# EAGLE board sencerMain2 (EAGLE 7.4.0)
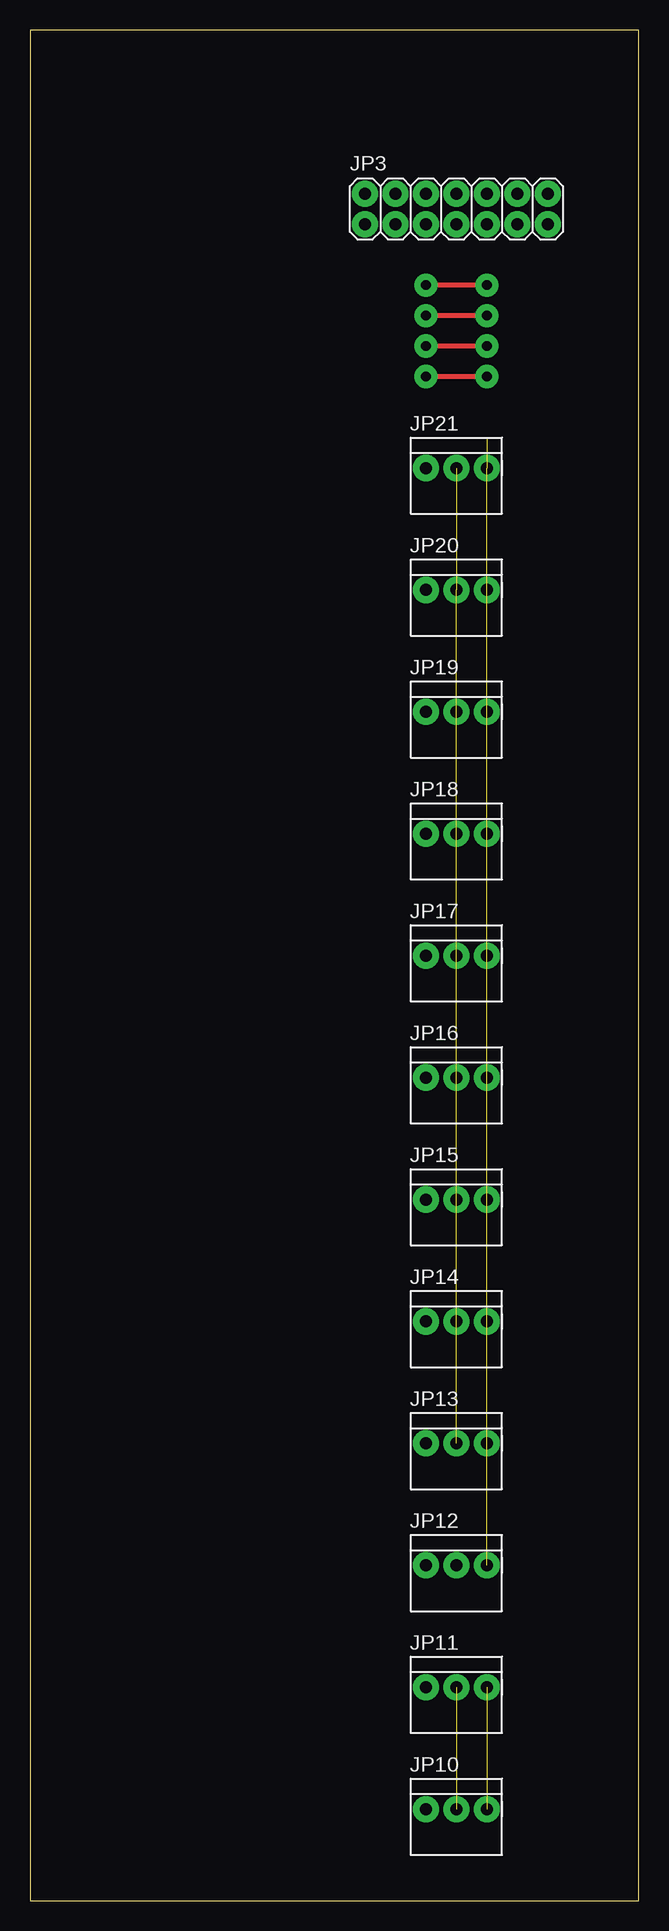
[diagram p0: board, top side]
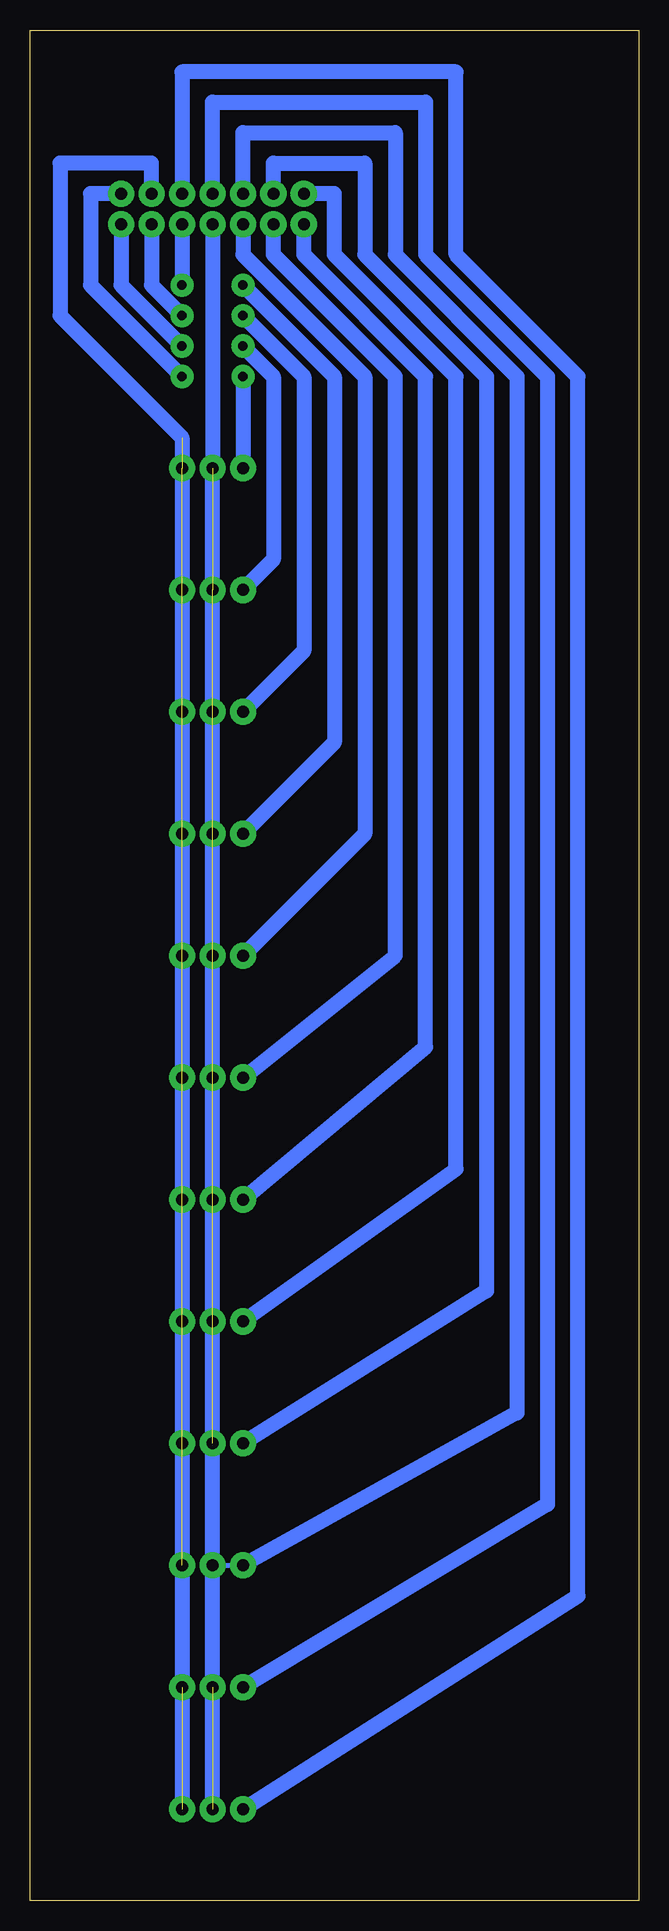
[diagram p1: board, bottom side, seen from below]

Size 50.78 x 155.88 mm. Coordinates in mm from the lower left corner, seen from the top.
Outline: 0,0 50.78,0 50.78,155.88 0,155.88 0,0
Copper layers (1*16): Top 0.035mm / dielectric 1.5mm / Bottom 0.035mm
Design rules "default": minimum track width 10mil, minimum drill 24mil, track to track 8mil, track to pad 8mil, pad to pad 8mil, via to via 8mil, smd to smd 8mil, copper to edge 40mil, drill to drill 8mil, minimum pad ring 10mil, minimum via ring 8mil, stop-mask expansion 4mil, vias tented up to drill 0mil, thermal gap 10mil

## Footprints (pad centres in the part's own frame; a part is rotated, then mirrored left to right if it is on the bottom)
2X07 = drill 1 pad 2.184: 1 -7.62,-1.27; 2 -7.62,1.27; 3 -5.08,-1.27; 4 -5.08,1.27; 5 -2.54,-1.27; 6 -2.54,1.27; 7 0,-1.27; 8 0,1.27; 9 2.54,-1.27; 10 2.54,1.27; 11 5.08,-1.27; 12 5.08,1.27; 13 7.62,-1.27; 14 7.62,1.27
1*03 = drill 1 pad 2.184: 1 -2.54,0; 2 0,0; 3 2.54,0

## Placement (x,y rotation side)
JP3  [2X07]  35.56,140.97 0 top
JP10  [1*03]  35.56,7.62 0 top
JP11  [1*03]  35.56,17.78 0 top
JP12  [1*03]  35.56,27.94 0 top
JP13  [1*03]  35.56,38.1 0 top
JP14  [1*03]  35.56,48.26 0 top
JP15  [1*03]  35.56,58.42 0 top
JP16  [1*03]  35.56,68.58 0 top
JP17  [1*03]  35.56,78.74 0 top
JP18  [1*03]  35.56,88.9 0 top
JP19  [1*03]  35.56,99.06 0 top
JP20  [1*03]  35.56,109.22 0 top
JP21  [1*03]  35.56,119.38 0 top

## Library data of the parts
JP3 JP10-JP21 = pinhead_s

## Nets
+5V: JP3.7 JP10.2 JP11.2 JP12.2 JP13.2 JP14.2 JP15.2 JP16.2 JP17.2 JP18.2 JP19.2 JP20.2 JP21.2
FOT1: JP3.10 JP10.1
FOT2: JP3.8 JP11.1
FOT3: JP3.6 JP12.1
FOT4: JP3.4 JP13.1
GND: JP3.12 JP10.3 JP11.3 JP13.3 JP14.3 JP15.3 JP17.3 JP18.3 JP19.3 JP21.3
N$25: JP12.3 JP16.3 JP20.3
RIMIT1: JP3.2 JP14.1
RIMIT2: JP3.1 JP15.1
RIMIT3: JP3.3 JP16.1
RIMIT4: JP3.5 JP17.1
RIMIT5: JP3.9 JP18.1
RIMIT6: JP3.11 JP19.1
RIMIT7: JP3.13 JP20.1
RIMIT8: JP3.14 JP21.1

## Tracks (layer width: path | path; a pad name or v marks a point on that pad's centre or on a via)
+5V  (9 unrouted)
  Bottom 0.406: JP21.2 JP12.2
  Bottom 1.27: JP3.7 JP21.2 JP10.2
FOT1
  Bottom 1.27: JP10.1 5.08,25.4 5.08,127 15.24,137.16 15.24,152.4 38.1,152.4 JP3.10
FOT2
  Bottom 1.27: JP3.8 35.56,149.86 17.78,149.86 17.78,137.16 7.62,127 7.62,33.02 JP11.1
FOT3
  Bottom 0.406: 35.56,27.94 JP12.1
  Bottom 1.27: JP3.6 33.02,147.32 20.32,147.32 20.32,137.16 10.16,127 10.16,40.64 JP12.1
FOT4
  Bottom 1.27: JP3.4 30.48,144.78 22.86,144.78 22.86,137.16 12.7,127 12.7,50.8 JP13.1
GND  (8 unrouted)
  Bottom 1.27: JP3.12 40.64,144.78 48.26,144.78 48.26,132.08 38.1,121.92 JP10.3
N$25  (2 unrouted)
RIMIT1
  Bottom 1.27: JP14.1 15.24,60.96 15.24,127 25.4,137.16 25.4,142.24 JP3.2
RIMIT2
  Bottom 1.27: JP3.1 27.94,137.16 17.78,127 17.78,71.12 JP15.1
RIMIT3
  Bottom 1.27: JP16.1 20.32,78.74 20.32,127 30.48,137.16 JP3.3
RIMIT4
  Bottom 1.27: JP3.5 33.02,137.16 22.86,127 22.86,88.9 JP17.1
RIMIT5  (via drill 0.8 pad 1.93)
  Top 0.406: v38.1,134.62 v33.02,134.62
  Bottom 1.27: JP3.9 v38.1,134.62 | v33.02,134.62 25.4,127 25.4,96.52 JP18.1
RIMIT6  (via drill 0.8 pad 1.93)
  Top 0.406: v38.1,132.08 v33.02,132.08
  Bottom 1.27: JP3.11 40.64,134.62 v38.1,132.08 | v33.02,132.08 27.94,127 27.94,104.14 JP19.1
RIMIT7  (via drill 0.8 pad 1.93)
  Top 0.406: v38.1,129.54 v33.02,129.54
  Bottom 1.27: JP3.13 43.18,134.62 v38.1,129.54 | v33.02,129.54 30.48,127 30.48,111.76 JP20.1
RIMIT8  (via drill 0.8 pad 1.93)
  Top 0.406: v38.1,127 v33.02,127
  Bottom 1.27: JP3.14 45.72,142.24 45.72,134.62 v38.1,127 | v33.02,127 JP21.1